# EAGLE board WB-v2.0b (EAGLE 6.1)
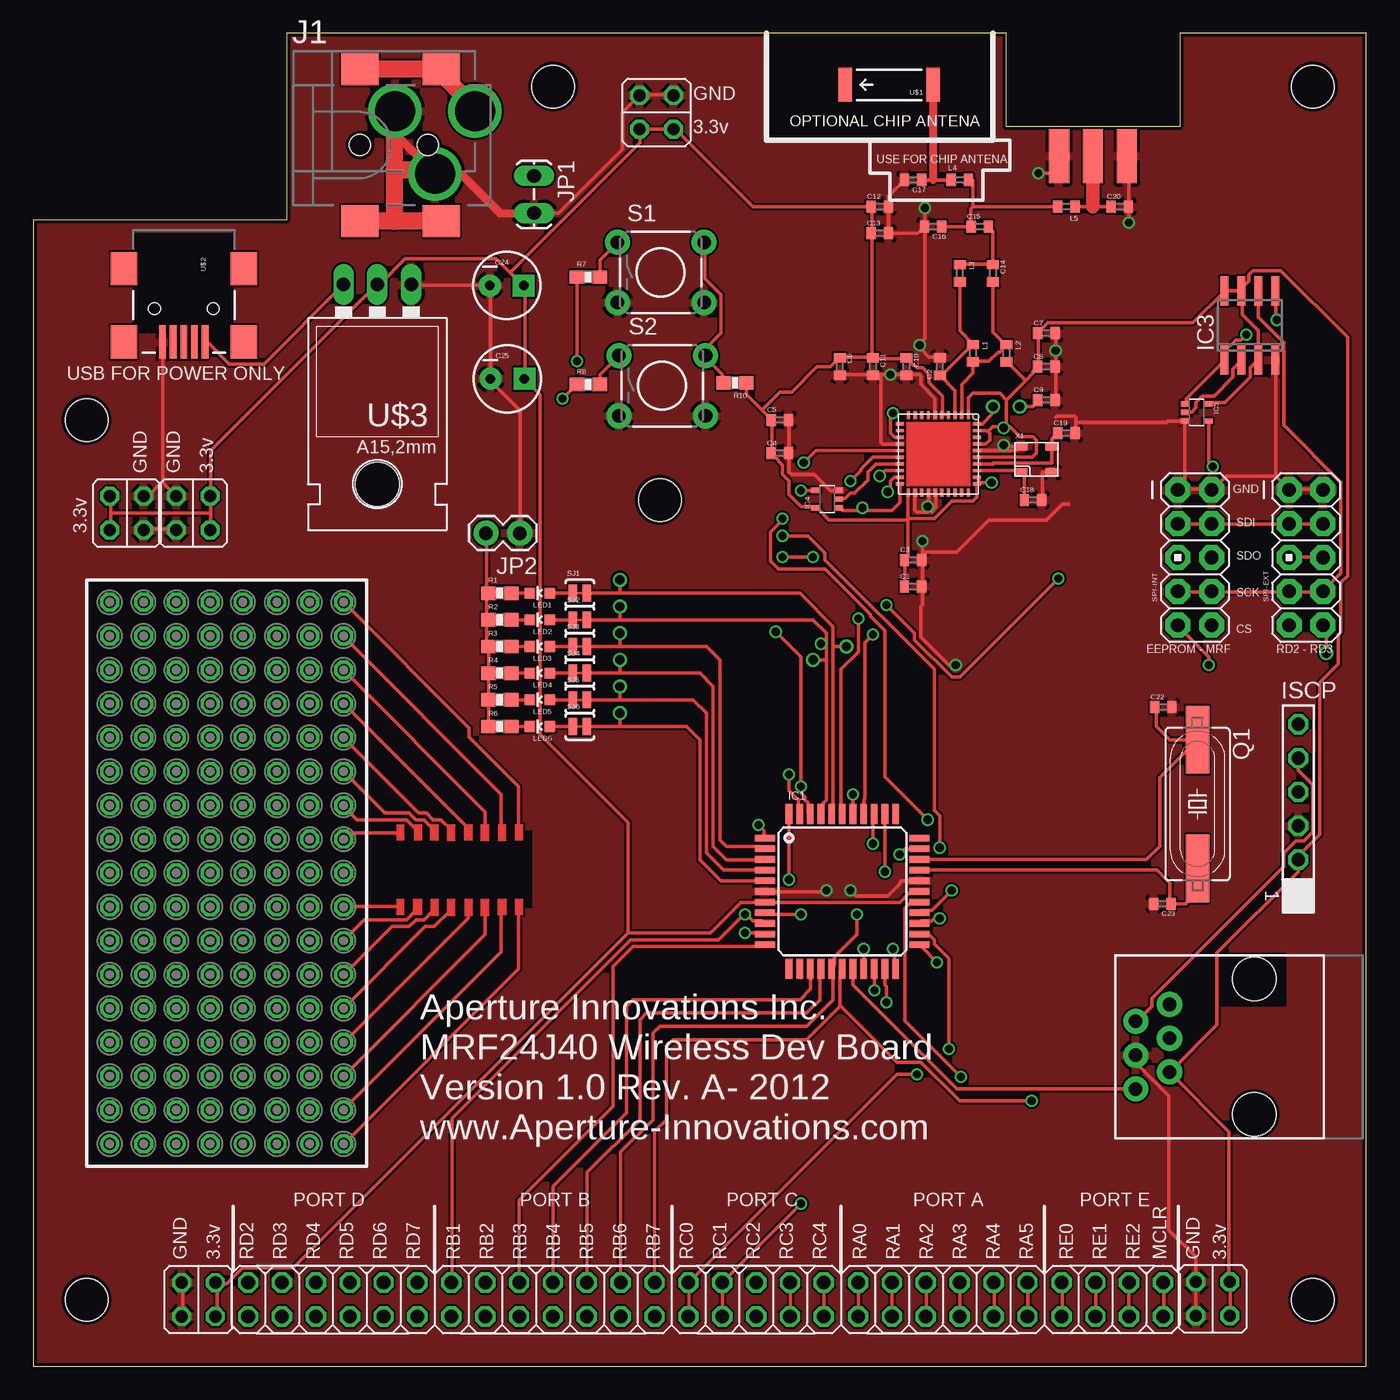
[diagram p0: board, top side]
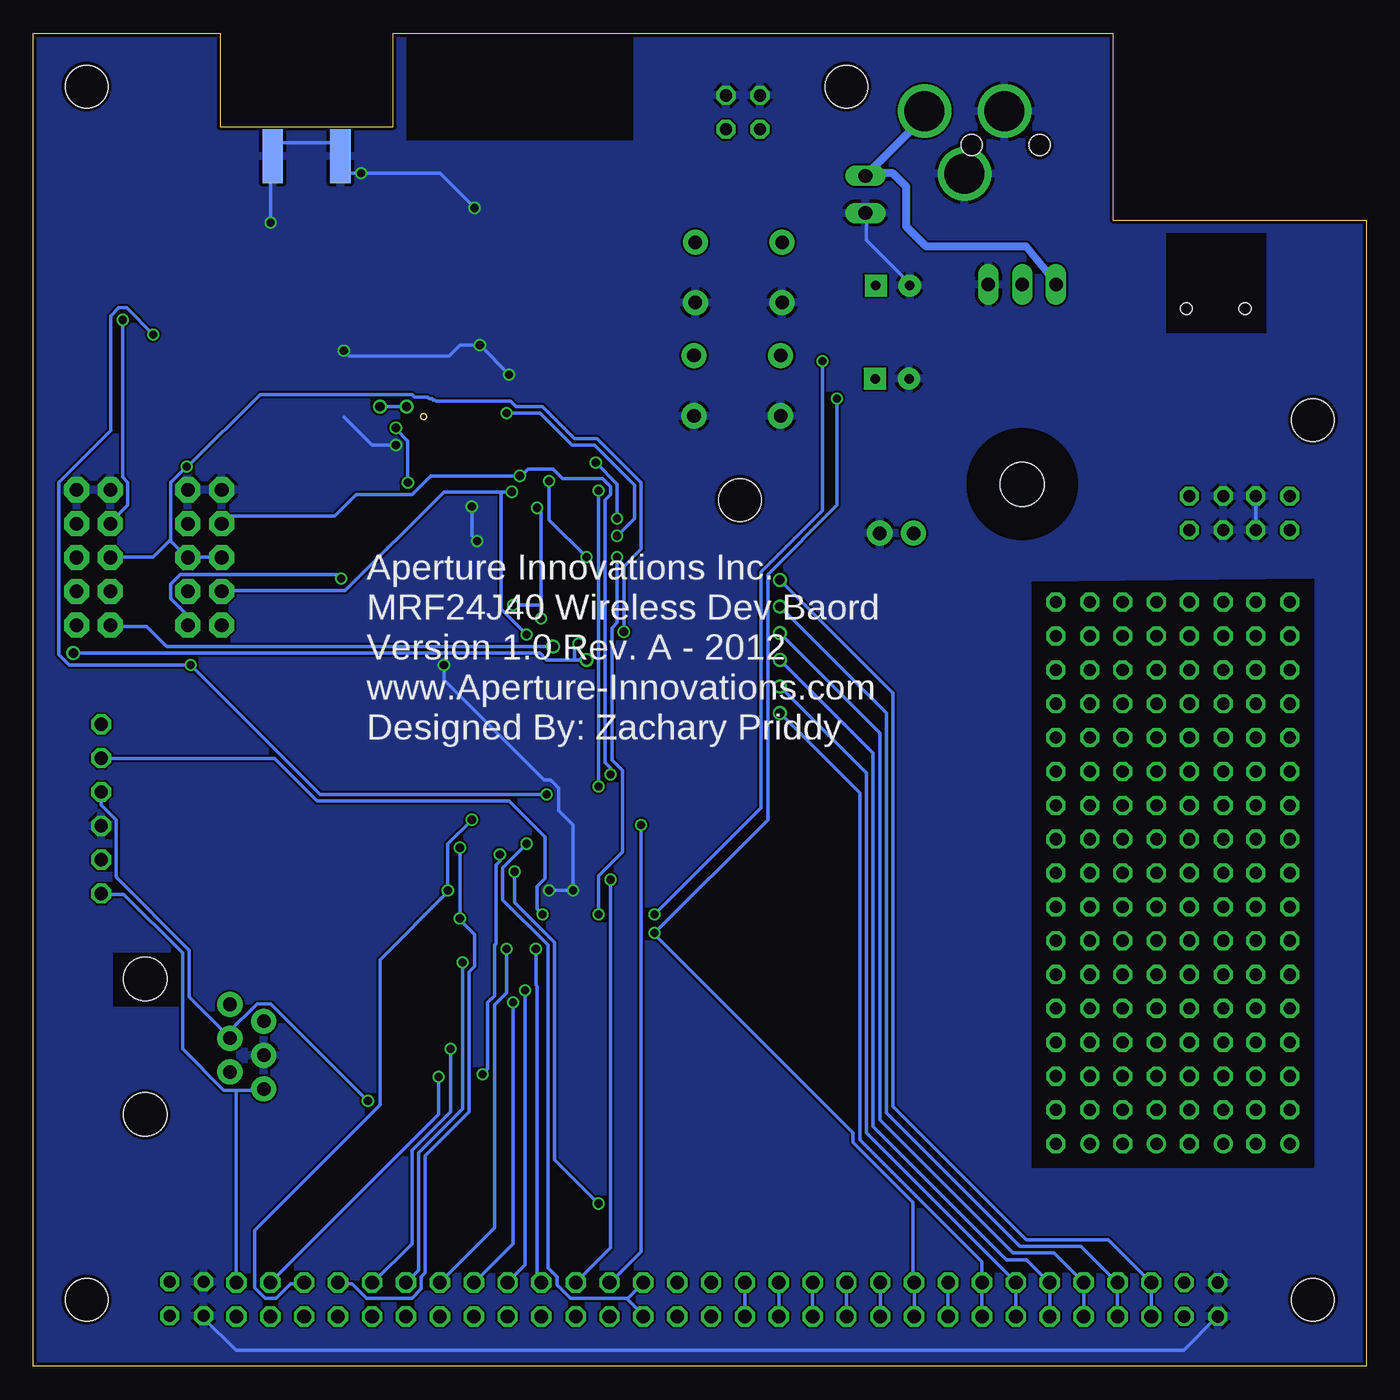
[diagram p1: board, bottom side, seen from below]

Size 100 x 100 mm. Coordinates in mm from the lower left corner, seen from the top.
Outline: 0,0 100,0 100,100 86,100 86,93 73,93 73,100 19,100 19,86 0,86 0,0
Copper layers (1*16): Top 0.035mm / dielectric 1.5mm / Bottom 0.035mm
Design rules: minimum track width 6mil, minimum drill 12mil, track to track 6mil, track to pad 6mil, pad to pad 6mil, via to via 6mil, smd to smd 0mil, copper to edge 10mil, drill to drill 10mil, minimum pad ring 10mil, minimum via ring 6mil, stop-mask expansion 2mil, vias tented up to drill 100mil, thermal gap 10mil
Holes 3.2 mm at 4,5 96,5 96,96 4,71 39,96 47,65
tRestrict: area 4,15 to 25,59; area 89,27 to 94,31; area 55,92 to 72,100; area 7.5,77.5 to 15,85; area 25.1,34.4 to 37.4,40.2
bRestrict: area 4,15 to 25,59; area 89,27 to 94,31; area 55,92 to 72,100; area 7.5,77.5 to 15,85

## Footprints (pad centres in the part's own frame; a part is rotated, then mirrored left to right if it is on the bottom)
C0402 = smd 0.7 x 0.9: 1 -0.65,0; 2 0.65,0
CPOL-RADIAL-10UF-25V = drill 0.7 pad 1.651 square: 1 1.27,0 | drill 0.7 pad 1.651: 2 -1.27,0
TQFP44 = smd 1.5 x 0.5: 1 -5.8,4; 2 -5.8,3.2; 3 -5.8,2.4; 4 -5.8,1.6; 5 -5.8,0.8; 6 -5.8,0; 7 -5.8,-0.8; 8 -5.8,-1.6; 9 -5.8,-2.4; 10 -5.8,-3.2; 11 -5.8,-4; 23 5.8,-4; 24 5.8,-3.2; 25 5.8,-2.4; 26 5.8,-1.6; 27 5.8,-0.8; 28 5.8,0; 29 5.8,0.8; 30 5.8,1.6; 31 5.8,2.4; 32 5.8,3.2; 33 5.8,4 | smd 0.5 x 1.5: 12 -4,-5.8; 13 -3.2,-5.8; 14 -2.4,-5.8; 15 -1.6,-5.8; 16 -0.8,-5.8; 17 0,-5.8; 18 0.8,-5.8; 19 1.6,-5.8; 20 2.4,-5.8; 21 3.2,-5.8; 22 4,-5.8; 34 4,5.8; 35 3.2,5.8; 36 2.4,5.8; 37 1.6,5.8; 38 0.8,5.8; 39 0,5.8; 40 -0.8,5.8; 41 -1.6,5.8; 42 -2.4,5.8; 43 -3.2,5.8; 44 -4,5.8
QFN40 = smd 0.6 x 0.25: 1 -2.9,2.25; 2 -2.9,1.75; 3 -2.9,1.25; 4 -2.9,0.75; 5 -2.9,0.25; 6 -2.9,-0.25; 7 -2.9,-0.75; 8 -2.9,-1.25; 9 -2.9,-1.75; 10 -2.9,-2.25; 21 2.9,-2.25; 22 2.9,-1.75; 23 2.9,-1.25; 24 2.9,-0.75; 25 2.9,-0.25; 26 2.9,0.25; 27 2.9,0.75; 28 2.9,1.25; 29 2.9,1.75; 30 2.9,2.25 | smd 0.25 x 0.6: 11 -2.25,-2.9; 12 -1.75,-2.9; 13 -1.25,-2.9; 14 -0.75,-2.9; 15 -0.25,-2.9; 16 0.25,-2.9; 17 0.75,-2.9; 18 1.25,-2.9; 19 1.75,-2.9; 20 2.25,-2.9; 31 2.25,2.9; 32 1.75,2.9; 33 1.25,2.9; 34 0.75,2.9; 35 0.25,2.9; 36 -0.25,2.9; 37 -0.75,2.9; 38 -1.25,2.9; 39 -1.75,2.9; 40 -2.25,2.9
SO-08 = smd 0.6 x 2.2: 1 -1.905,-2.6; 2 -0.635,-2.6; 3 0.635,-2.6; 4 1.905,-2.6; 5 1.905,2.6; 6 0.635,2.6; 7 -0.635,2.6; 8 -1.905,2.6
SC70-5 = smd 0.4 x 0.7: 1 -0.65,-0.85; 2 0,-0.85; 3 0.65,-0.85; 4 0.65,0.85; 5 -0.65,0.85
RJ11-6 = drill 1.016 pad 1.88: 1 1.905,8.89; 2 3.175,6.35; 3 4.445,8.89; 4 5.715,6.35; 5 6.985,8.89; 6 8.255,6.35 | hole 3.251: 0,0; 10.16,0
TSW-106-02-S-S = drill 1 pad 1.5 octagon: 1 6.35,0; 2 3.81,0; 3 1.27,0; 4 -1.27,0; 5 -3.81,0; 6 -6.35,0
POWER_JACK_COMBO = drill 2.997: GND 5.62,-2.16; GND@1 2.62,2.54; POWER 8.62,2.54 | smd 2.8 x 2.4: GND@3 0,-5.7; GND@4 6.1,-5.7; POWER@1 0,5.7; POWER@2 6.1,5.7 | hole 1.6: 0,0; 5.08,0
SMA-EDGE = smd 1.524 x 4.064: GND@0 0,0; GND@1 5.08,0; SIG 2.54,0 | smd 1.524 x 4.064 bottom: GND@2 0,0; GND@3 5.08,0
1X02_LOCK_LONGPADS = drill 1.016 long: 1 -0.127,0; 2 2.667,0
1X02 = drill 1.016 pad 1.88: 1 0,0; 2 2.54,0
JP2Q = drill 0.914 octagon: 1 -1.27,-1.27; 2 -1.27,1.27; 3 1.27,-1.27; 4 1.27,1.27
LED-0603 = smd 0.8 x 0.8: A 0,-0.75; C 0,0.75
FE17-2 = drill 0.914: 1 -20.32,1.27 | drill 0.914 octagon: 2 -20.32,-1.27; 3 -17.78,1.27; 4 -17.78,-1.27; 5 -15.24,1.27; 6 -15.24,-1.27; 7 -12.7,1.27; 8 -12.7,-1.27; 9 -10.16,1.27; 10 -10.16,-1.27; 11 -7.62,1.27; 12 -7.62,-1.27; 13 -5.08,1.27; 14 -5.08,-1.27; 15 -2.54,1.27; 16 -2.54,-1.27; 17 0,1.27; 18 0,-1.27; 19 2.54,1.27; 20 2.54,-1.27; 21 5.08,1.27; 22 5.08,-1.27; 23 7.62,1.27; 24 7.62,-1.27; 25 10.16,1.27; 26 10.16,-1.27; 27 12.7,1.27; 28 12.7,-1.27; 29 15.24,1.27; 30 15.24,-1.27; 31 17.78,1.27; 32 17.78,-1.27; 33 20.32,1.27; 34 20.32,-1.27
MA06-2 = drill 1.016 octagon: 1 -6.35,-1.27; 2 -6.35,1.27; 3 -3.81,-1.27; 4 -3.81,1.27; 5 -1.27,-1.27; 6 -1.27,1.27; 7 1.27,-1.27; 8 1.27,1.27; 9 3.81,-1.27; 10 3.81,1.27; 11 6.35,-1.27; 12 6.35,1.27
MA07-2 = drill 1.016 octagon: 1 -7.62,-1.27; 2 -7.62,1.27; 3 -5.08,-1.27; 4 -5.08,1.27; 5 -2.54,-1.27; 6 -2.54,1.27; 7 0,-1.27; 8 0,1.27; 9 2.54,-1.27; 10 2.54,1.27; 11 5.08,-1.27; 12 5.08,1.27; 13 7.62,-1.27; 14 7.62,1.27
MA05-2 = drill 1.016 octagon: 1 -5.08,-1.27; 2 -5.08,1.27; 3 -2.54,-1.27; 4 -2.54,1.27; 5 0,-1.27; 6 0,1.27; 7 2.54,-1.27; 8 2.54,1.27; 9 5.08,-1.27; 10 5.08,1.27
MA04-2 = drill 1.016 octagon: 1 -3.81,-1.27; 2 -3.81,1.27; 3 -1.27,-1.27; 4 -1.27,1.27; 5 1.27,-1.27; 6 1.27,1.27; 7 3.81,-1.27; 8 3.81,1.27
SM49 = smd 5.08 x 1.778: 1 -4.826,0; 2 4.826,0
0603-RES = smd 1.1 x 1: 1 -0.85,0; 2 0.85,0
TACTILE-PTH = drill 1.016 pad 1.88: 1 -3.251,2.261; 2 3.251,2.261; 3 -3.251,-2.261; 4 3.251,-2.261
SJ_2S-TRACE = smd 0.635 x 1.27: 1 -0.508,0; 2 0.508,0
AVR_ICSP = drill 1.016 pad 1.88 octagon: 1 -1.27,5.08; 2 1.27,5.08; 3 -1.27,2.54; 4 1.27,2.54; 5 -1.27,0; 6 1.27,0; 7 -1.27,-2.54; 8 1.27,-2.54; 9 -1.27,-5.08; 10 1.27,-5.08
ANTENNA-CHIP5 = smd 1.016 x 2.54: FEED -3.302,0; NC 3.302,0
USB-MINIB = smd 2.5 x 0.5: D+ 2.5,0; D- 2.5,0.8; GND 2.5,-1.6; ID 2.5,-0.8; VBUS 2.5,1.6 | smd 2.5 x 2: MTN1 -3,4.5; MTN2 2.5,4.5; MTN3 -3,-4.5; MTN4 2.5,-4.5 | hole 0.9: 0,2.2; 0,-2.2
78XXL = drill 1.016 long: GND 0,-3.81; IN -2.54,-3.81; OUT 2.54,-3.81 | hole 3.302: 0,11.176
ABM8 = smd 0.991 x 0.66: P$1 0.434,0.272; P$2 2.766,0.271; P$3 2.772,2.229; P$4 0.428,2.229

## Placement (x,y rotation side)
C1  0.01uF  [C0402]  66,58.5 0 top
C2  0.5pF  [C0402]  68,75 90 top
C3  0.01uF  [C0402]  66,60.5 0 top
C4  47pF  [C0402]  56,68.5 0 top
C5  47pF  [C0402]  56,71 0 top
C6  47pF  [C0402]  60.5,75 270 top
C7  0.01uF  [C0402]  76,77.5 0 top
C8  1uF  [C0402]  76,75 0 top
C9  100pF  [C0402]  76,72.5 0 top
C10  47pF  [C0402]  65.5,75 270 top
C11  0.1uF  [C0402]  63,75 270 top
C12  0.01uf  [C0402]  63.5,87 0 top
C13  47pf  [C0402]  63.5,85 0 top
C14  0.5pF  [C0402]  72,82 270 top
C15  0.5pF  [C0402]  71,85.5 0 top
C16  0.5pF  [C0402]  67.5,85.5 180 top
C17  0.3pF  [C0402]  66,89 180 top
C18  18pF  [C0402]  75,65 0 top
C19  18pF  [C0402]  77.5,70 0 top
C20  0.3pF  [C0402]  81.5,87 0 top
C22  18pF  [C0402]  84.77,49.45 0 top
C23  18pF  [C0402]  84.71,34.7 180 top
C24  47pf  [CPOL-RADIAL-10UF-25V]  35.52,81.08 0 top
C25  0.01uf  [CPOL-RADIAL-10UF-25V]  35.57,74.08 0 top
IC1  PIC18F4455_TQFP  [TQFP44]  60.69,35.62 0 top
IC2  MRF24J40  [QFN40]  67.91,68.44 270 top
IC3  MCHP-25LC080  [SO-08]  91.26,78.08 0 top
IC4  74AHCT1G125DCK  [SC70-5]  59.56,65.06 90 top
IC5  74AHCT1G125DCK  [SC70-5]  87.28,71.56 270 top
ICSP-RJ11  RJ11-6PTH  [RJ11-6]  91.6,18.89 90 top
ISCP  [TSW-106-02-S-S]  94.9,41.81 270 top
J1  POWER_JACKCOMBO  [POWER_JACK_COMBO]  24.51,91.62 0 top
J$1  SMA_EDGE  [SMA-EDGE]  76.96,90.79 0 top
JP1  [1X02_LOCK_LONGPADS]  37.57,89.19 270 top
JP2  [1X02]  36.5,62.5 180 top
JP3  [JP2Q]  12.39,5 90 top
JP4  [JP2Q]  88.5,5.05 90 top
JP5  [JP2Q]  7,64 270 top
JP6  [JP2Q]  12,64 90 top
JP7  [JP2Q]  46.75,94.07 0 top
L1  10nH  [C0402]  70.5,76 270 top
L2  10nH  [C0402]  73,76 270 top
L3  5.6nH  [C0402]  69.5,82 270 top
L4  4.7nH  [C0402]  69.5,89 0 top
L5  4.7nH  [C0402]  77.5,87 180 top
LED1  [LED-0603]  38,58 90 top
LED2  [LED-0603]  38,56 90 top
LED3  [LED-0603]  38,54 90 top
LED4  [LED-0603]  38,52 90 top
LED5  [LED-0603]  38,50 90 top
LED6  [LED-0603]  38,48 90 top
PB1  [FE17-2]  7,37 90 top
PB2  [FE17-2]  12,37 90 top
PB3  [FE17-2]  17,37 90 top
PB4  [FE17-2]  22,37 90 top
PORT-A  [MA06-2]  68.23,5 0 top
PORT-B  [MA07-2]  38.99,5 0 top
PORT-C  [MA05-2]  54.23,5 0 top
PORT-D  [MA06-2]  22.47,5 0 top
PORT-E  [MA04-2]  80.95,5 0 top
Q1  [SM49]  87.34,42.17 270 top
R1  470  [0603-RES]  35,58 0 top
R2  470  [0603-RES]  35,56 0 top
R3  470  [0603-RES]  35,54 0 top
R4  470  [0603-RES]  35,52 0 top
R5  470  [0603-RES]  35,50 0 top
R6  470  [0603-RES]  35,48 0 top
R7  1k  [0603-RES]  41.64,81.71 0 top
R8  1k  [0603-RES]  41.64,73.65 0 top
R10  10k  [0603-RES]  52.64,73.78 180 top
S1  [TACTILE-PTH]  47.07,82.06 0 top
S2  [TACTILE-PTH]  47.18,73.56 0 top
SJ1  [SJ_2S-TRACE]  41,58 0 top
SJ2  [SJ_2S-TRACE]  41,56 0 top
SJ3  [SJ_2S-TRACE]  41,54 0 top
SJ4  [SJ_2S-TRACE]  41,52 0 top
SJ5  [SJ_2S-TRACE]  41,50 0 top
SJ6  [SJ_2S-TRACE]  41,48 0 top
SPI-EXT  M05X2PTH  [AVR_ICSP]  95.49,60.67 0 top
SPI-INT  M05X2PTH  [AVR_ICSP]  87.14,60.67 0 top
U$1  ANTENNA2SMD5  [ANTENNA-CHIP5]  64.22,96.14 180 top
U$2  USB-MINIB-5PIN  [USB-MINIB]  11.29,79.35 270 top
U$3  3.3V  [78XXL]  25.81,77.35 180 top
X1  ABM8  [ABM8]  73.66,66.79 0 top

## Library data of the parts
C1-C20 C22 C23 IC4 IC5 JP3-JP7 X1 = ZPRIDDY
C24 C25 ICSP-RJ11 J1 J$1 JP1 JP2 L1-L5 LED1-LED6 R1-R8 R10 S1 S2 SJ1-SJ6 SPI-EXT SPI-INT U$1-U$3 = SparkFun
IC1 = ZPRIDDY; MF: MICROCHIP; MPN: PIC18F4455-I/PT; OC_FARNELL: 9321322; OC_NEWARK: 08J9628
IC2 = mrf24j40
IC3 = microchip; MF: MICROCHIP; MPN: 25AA080/SN; OC_FARNELL: 1816072; OC_NEWARK: 92C7351
ISCP = con-samtec; OC_FARNELL: unknown; OC_NEWARK: unknown
PB1-PB4 PORT-A PORT-B PORT-C PORT-D PORT-E = ZPRIDDY; OC_FARNELL: unknown; OC_NEWARK: unknown
Q1 = crystal; OC_FARNELL: unknown; OC_NEWARK: unknown

## Nets
EEPROM-CS: IC1.38 IC3.1 IC5.1 SPI-INT.9
GND: C1.2 C2.2 C3.2 C4.2 C5.2 C6.2 C7.2 C8.2 C9.2 C10.2 C11.2 C12.2 C13.2 C16.2 C17.2 C18.2 C19.2 C20.2 C22.2 C23.2 C24.2 C25.2 IC1.6 IC1.29 IC2.6 IC2.14 IC2.22 IC2.24 IC2.25 IC2.36 IC3.4 IC4.3 IC5.3 ICSP-RJ11.3 ISCP.3 J1.GND J1.GND@1 J$1.GND@0 J$1.GND@1 J$1.GND@2 J$1.GND@3 JP1.2 JP2.1 JP3.2 JP3.4 JP4.2 JP4.4 JP5.2 JP5.4 JP6.2 JP6.4 JP7.2 JP7.4 S1.3 S1.4 S2.3 S2.4 SPI-EXT.1 SPI-EXT.2 SPI-INT.1 SPI-INT.2 U$2.GND U$3.IN X1.P$2 X1.P$4
MCLR: IC1.18 ICSP-RJ11.1 ISCP.1 PORT-E.7 PORT-E.8
MRF-CS: IC1.39 IC2.20 IC4.1 SPI-INT.10
MRF-INT: IC1.8 IC2.16
N$1: C14.1 C15.2 L3.1
N$2: C2.1 IC2.3 L1.1 L3.2
N$3: C14.2 IC2.2 L1.2 L2.1
N$4: C15.1 C16.1 L4.2 L5.2
N$5: C17.1 L4.1 U$1.FEED
N$6: C9.1 IC2.40
N$7: C18.1 IC2.33 X1.P$1
N$8: C19.1 IC2.34 X1.P$3
N$9: C20.1 J$1.SIG L5.1
N$10: IC2.17 IC4.2
N$11: IC3.2 IC5.2
N$12: C23.1 IC1.30 Q1.2
N$13: C22.1 IC1.31 Q1.1
N$14: LED1.C R1.2
N$15: LED2.C R2.2
N$16: LED3.C R3.2
N$17: LED4.C R4.2
N$18: LED5.C R5.2
N$19: LED6.C R6.2
N$20: R7.2 S1.1
N$21: R10.2 S1.2 S2.2
N$22: LED1.A SJ1.1
N$23: LED3.A SJ3.1
N$24: LED4.A SJ4.1
N$25: LED5.A SJ5.1
N$26: LED6.A SJ6.1
N$27: R8.2 S2.1
N$29: LED2.A SJ2.1
N$30: JP2.2 R1.1 R2.1 R3.1 R4.1 R5.1 R6.1
N$31: PB4.34
N$32: PB4.32
N$33: PB4.30
N$34: PB4.28
N$35: PB4.26
N$36: PB4.24
N$37: PB4.22
N$38: PB4.20
N$39: PB4.2
N$40: PB4.4
N$41: PB4.6
N$42: PB4.8
N$43: PB4.10
N$44: PB4.12
N$45: PB4.14
N$46: PB4.16
RA0: IC1.19 PORT-A.1 PORT-A.2
RA1: IC1.20 PORT-A.3 PORT-A.4
RA2: IC1.21 PORT-A.5 PORT-A.6
RA3: IC1.22 PORT-A.7 PORT-A.8
RA4: IC1.23 PORT-A.9 PORT-A.10
RA5: IC1.24 PORT-A.11 PORT-A.12
RB1: IC1.9 PORT-B.1 PORT-B.2 R7.1
RB2: IC1.10 PORT-B.3 PORT-B.4 R8.1
RB3: IC1.11 PORT-B.5 PORT-B.6
RB4: IC1.14 PORT-B.7 PORT-B.8
RB5: IC1.15 PORT-B.9 PORT-B.10
RB6: IC1.16 ICSP-RJ11.5 ISCP.5 PORT-B.11 PORT-B.12
RB7: IC1.17 ICSP-RJ11.4 ISCP.4 PORT-B.13 PORT-B.14
RC0: IC1.32 PORT-C.1 PORT-C.2
RC1: IC1.35 PORT-C.3 PORT-C.4
RC2: IC1.36 PORT-C.5 PORT-C.6
RD2: IC1.40 PORT-D.1 PORT-D.2 SJ1.2 SPI-EXT.9
RD3: IC1.41 PORT-D.3 PORT-D.4 SJ2.2 SPI-EXT.10
RD4: IC1.2 PORT-D.5 PORT-D.6 SJ3.2
RD5: IC1.3 PORT-D.7 PORT-D.8 SJ4.2
RD6: IC1.4 PORT-D.9 PORT-D.10 SJ5.2
RD7: IC1.5 PORT-D.11 PORT-D.12 SJ6.2
RE0: IC1.25 IC2.13 PORT-E.1 PORT-E.2
RE1: IC1.26 IC2.15 PORT-E.3 PORT-E.4
RE2: IC1.27 PORT-E.5 PORT-E.6
RX: IC1.1 PORT-C.7 PORT-C.8
SCK: IC1.37 IC2.19 IC3.6 SPI-EXT.7 SPI-EXT.8 SPI-INT.7 SPI-INT.8
SDI: IC1.43 IC2.18 IC3.5 SPI-EXT.3 SPI-EXT.4 SPI-INT.3 SPI-INT.4
SDO: IC1.42 IC4.4 IC5.4 SPI-EXT.5 SPI-EXT.6 SPI-INT.5 SPI-INT.6
TX: IC1.44 PORT-C.9 PORT-C.10
VCC: C1.1 C3.1 C4.1 C5.1 C6.1 C7.1 C8.1 C10.1 C11.1 C12.1 C13.1 C24.1 C25.1 IC1.7 IC1.28 IC2.1 IC2.4 IC2.5 IC2.21 IC2.31 IC2.32 IC2.35 IC2.37 IC2.39 IC3.3 IC3.7 IC3.8 IC4.5 IC5.5 ICSP-RJ11.2 ISCP.2 JP3.1 JP3.3 JP4.1 JP4.3 JP5.1 JP5.3 JP6.1 JP6.3 JP7.1 JP7.3 L2.2 R10.1 U$3.GND
VIN: J1.POWER JP1.1 U$2.VBUS U$3.OUT

## Tracks (layer width: path | path; a pad name or v marks a point on that pad's centre or on a via)
EEPROM-CS  (via drill 0.61)
  Top 0.254: IC5.1 86.5,72.3 86.5,72.6 89.3,75.4 IC3.1 89.4,75.6 89.4,76.2 90.2,77 90.6,77 v91,77.4 | v61.5,42.9 61.5,41.5 IC1.38 | v88.2,52.6 88.2,53.2 85.9,55.5 SPI-INT.9
  Bottom 0.254: v61.5,42.9 78.5,42.9 v88.2,52.6 97.3,52.6 98.1,53.4 98.1,66.3 94.2,70.2 94.2,78.8 93.6,79.4 93,79.4 v91,77.4
GND  (via drill 0.61)
  Top 0.254: C17.2 64.15,87.8 C12.2 C13.2 66.35,85 C16.2 | IC2.36 73.76,68.69 X1.P$4 73.8,68.9 73.7,69 72.9,69 v72.8,69.1 | J$1.GND@1 82,90.7 82,89.4 82.2,89.2 82.2,87 C20.2 82.2,86.9 v82.2,85.8 | v75.4,89.5 76.9,89.5 77,89.6 77,90.7 J$1.GND@2 | IC4.3 59.8,65.7 58.6,66.9 56.9,66.9 56.7,67.1 56.7,68.5 C4.2 56.7,68.6 56.7,71 C5.2 | IC2.6 67.65,71.4 67.65,72.6 66.6,73.7 66.6,74.3 66.5,74.4 65.5,74.4 C10.2 65.4,74.4 v64.3,74.4 63.6,74.4 | 63.6,74.4 63.6,69.3 63.7,69.2 IC2.14 | 63.6,74.4 63,74.4 C11.2 62.9,74.4 60.5,74.4 C6.2 | C2.2 68,75.7 67.2,75.7 66.5,76.4 v66.5,76.6 66.5,76.7 66.9,77.1 66.9,85.2 66.8,85.3 C16.2 | v66.9,86.9 66.9,85.6 C16.2 | JP5.4 8.3,62.8 10.7,62.8 JP6.2 | 9.7,66.3 9.7,76.8 | JP6.4 9.7,66.3 | JP5.2 8.3,65.3 8.6,65.3 9.6,66.3 9.7,66.3 | JP7.4 48,95.4 45.5,95.4 JP7.2 45.4,95.3 44.2,94.1 44.2,91.3 39.4,86.5 37.6,86.5 JP1.2 | U$3.IN 28.4,81.1 34.2,81.1 C24.2 34.3,81 C25.2 34.3,73.9 36.5,71.7 JP2.1 | 43.9,71.7 S2.3 | JP3.2 11.2,3.8 11.2,6.2 JP3.4 | JP4.2 JP4.4 87.2,8.2 85.2,10.2 85.2,20.3 82.8,22.7 82.8,23.3 ICSP-RJ11.3 | v59.5,35.7 59.4,35.6 54.9,35.6 IC1.6 | v61.3,35.7 61.7,35.3 64.1,35.3 65,36.2 65,36.3 65.1,36.4 66.4,36.4 IC1.29 | 67.2,64.2 67.1,64.1 66.3,64.1 66.15,64.2 66.15,65.5 IC2.22 | 67.2,64.5 67.2,65.5 IC2.24 | 67.2,64.5 67.2,64.2 | IC2.25 67.7,65.5 67.7,64.4 67.4,64.1 67.3,64.2 67.2,64.2 | 66.7,61.1 66.7,60.6 C3.2 66.7,60.5 66.7,58.5 C1.2 66.7,58.4 66.7,57.1 66.6,57 66.6,54.7 68.7,52.6 v69.2,52.6 | 66.7,61.1 v66.7,61.9 | v67.1,64.5 67.2,64.5 | C18.2 75.7,65.5 75.7,67.1 76.4,67.1 X1.P$2 | C7.2 76.7,77.5 v76.7,76.2 76.7,75.1 C8.2 76.7,75 76.7,72.5 C9.2 76.7,72.4
  Top 0.254: 78.2,70.8 78.2,71.2 78.1,71.3 76.8,71.3 76.7,71.2 | 78.2,70.8 78.2,70.1 C19.2 | 66.7,61.1 69.3,61.1 71.7,63.5 76,63.5 77.2,64.7 77.7,64.7 | 93.2,66.8 93.2,75.4 IC3.4 | 93.2,66.8 94.2,65.8 SPI-EXT.1 94.3,65.8 96.7,65.8 SPI-EXT.2 | 93.2,66.8 89.5,66.8 88.5,65.8 SPI-INT.2 88.4,65.8 85.9,65.8 SPI-INT.1 86.4,65.9 86.4,70.9 IC5.3 86.3,70.9 85.1,70.9 85,70.8 78.2,70.8
  Top 0.61: J1.GND@1 27.13,92.46 J1.GND 32.04,89.46 35,86.5 37.55,86.5 JP1.2
  Bottom 0.254: v82.2,85.8 82.2,89.2 82,89.4 82,90.7 J$1.GND@1 82,90.8 82,91.8 77,91.8 77,90.9 J$1.GND@2 77,90.7 77,89.6 76.9,89.5 v75.4,89.5 69.5,89.5 v66.9,86.9 | v64.3,74.4 v66.5,76.6 68,76.6 68.8,75.8 76.3,75.8 v76.7,76.2 | JP5.4 8.3,62.8 8.3,65.2 JP5.2 | JP1.2 37.5,86.5 37.5,84.5 34.3,81.3 34.3,81.1 C24.2 | JP4.2 87.2,3.6 84.8,1.2 13.7,1.2 11.2,3.7 JP3.2 | v61.3,35.7 v59.5,35.7 59.5,40.6 60.6,41.7 60.6,43.4 61.2,44 61.7,44 69.2,51.5 v69.2,52.6 | v67.1,64.5 67.1,62.3 v66.7,61.9 | v72.8,69.1 74.6,69.1 76.7,71.2
  pour Bottom: -8.5,106 112,106 112,-10.5 -7.5,-10.5 -7.5,104
  pour Top: -19.5,111 117,111 117,-13.5 -19.5,-13.5 -19.5,109
MCLR
  Top 0.254: PORT-E.7 84.8,3.8 84.8,6.2 PORT-E.8 | IC1.18 61.5,29.8 61.5,28.6 69.3,20.8 ICSP-RJ11.1
  Bottom 0.254: 84.8,20.7 82.8,20.7 ICSP-RJ11.1 | 84.8,20.7 85.7,20.7 88.8,23.8 88.8,31 93.2,35.4 94.9,35.4 ISCP.1 | 84.8,20.7 84.8,6.3 PORT-E.8
MRF-CS  (via drill 0.61)
  Top 0.254: 62.2,64.2 60.7,64.2 60.5,64.4 IC4.1 | 62.2,64.2 64.4,64.2 65,64.8 65,66.1 IC2.20 | v61.9,56.1 61.9,53.6 60.6,52.3 60.6,41.5 IC1.39 | v62.2,64.4 62.2,64.2 | v76.9,59.1 69.5,51.7 68.9,51.7 66.1,54.5 66.1,55 v64,57.1
  Bottom 0.254: 61.9,57.1 61.9,64.1 v62.2,64.4 | 61.9,57.1 v61.9,56.1 | v76.9,59.1 77.2,59.4 89,59.4 89.7,58.7 89.7,57.6 88.5,56.4 88.5,55.6 SPI-INT.10 | 61.9,57.1 v64,57.1
MRF-INT  (via drill 0.61)
  Top 0.254: v61.3,66.4 62.1,67.2 62.1,67.3 63,68.2 IC2.16 | v56.2,60.7 v58.5,60.7 | v57.6,33.9 55,33.9 54.9,34 IC1.8
  Bottom 0.254: v61.3,66.4 61.3,63.5 v58.5,60.7 | v56.2,60.7 56.2,55.8 56.6,55.4 56.6,45.5 55.8,44.7 55.8,38.6 57.6,36.8 v57.6,33.9
N$1
  Top 0.254: C14.1 72,83 | C14.1 72,85.15 C15.2 | L3.1 69.5,82.7 71.9,82.7 C14.1
N$2
  Top 0.254: IC2.3 69.16,73.19 C2.1 68.2,74.3 68.2,74.4 70.4,76.6 L1.1 70.5,76.7 69.5,77.7 L3.2
N$3
  Top 0.254: C14.2 72,77.6 72.9,76.7 L2.1 73,76.6 72.5,76.1 72.4,76.1 71.7,75.4 70.5,75.4 L1.2 70.5,74.5 69.66,73.66 IC2.2
N$4
  Top 0.254: 70.35,89 L4.2 70.5,89 70.5,87 | 70.5,87 L5.2 | C16.1 C15.1 70.35,86.85 70.5,87
N$5
  Top 0.254: L4.1 67.5,89 C17.1 | U$1.FEED 67.5,96.14
  Top 0.61: 67.5,96.14 67.5,89
N$6  (via drill 0.7 pad 0.61)
  Top 0.254: IC2.40 71.19,70.69 72,71.5 v72,72 | v74,72 75,72 75.45,72.45 | 75.45,72.45 75.5,72.5 | C9.1 75.4,72.5 75.45,72.45
  Bottom 0.254: v72,72 v74,72
N$7
  Top 0.254: IC2.33 74,67.19 74,67 74.09,67 X1.P$1 74.35,66.81 C18.1
N$8
  Top 0.254: IC2.34 72,67.69 72,67.75 76.4,67.75 76.43,67.79 X1.P$3 76.43,69.58 C19.1
N$9
  Top 0.254: 79.5,87 L5.1 C20.1
  Top 1.016: J$1.SIG 79.5,87
N$10
  Top 0.254: IC2.17 63.2,67.7 62.6,67.1 62.6,66.5 61.6,65.5 61.3,65.5 60.9,65.1 60.5,65.1 IC4.2
N$11
  Top 0.254: IC5.2 86.5,71.6 86.9,71.6 87.2,71.9 87.2,72.3 87.7,72.8 88.6,72.8 90,74.2 90,74.8 90.6,75.4 IC3.2
N$12
  Top 0.254: IC1.30 84.28,37.22 85.25,36.25 85.25,34.7 | 85.25,34.7 85.25,34.5 | Q1.2 87.25,37.25 87.25,35.5 86.45,34.7 C23.1 85.25,34.7
N$13
  Top 0.254: IC1.31 83.52,38.02 84.5,39 84.5,44.16 Q1.1 85.25,47 84.25,48 84.25,49.32 C22.1
N$14
  Top 0.254: R1.2 LED1.C
N$15
  Top 0.254: R2.2 LED2.C
N$16
  Top 0.254: R3.2 LED3.C
N$17
  Top 0.254: R4.2 LED4.C
N$18
  Top 0.254: R5.2 LED5.C
N$19
  Top 0.254: R6.2 LED6.C
N$20
  Top 0.254: R7.2 42.5,81.8 42.5,83 43.8,84.3 S1.1
N$21
  Top 0.254: S1.2 50.4,84.3 50.4,81.6 51.6,80.4 51.6,77.5 50.5,76.4 S2.2 50.4,75.7 51.7,74.4 51.7,73.8 R10.2
N$22
  Top 0.254: LED1.A SJ1.1
N$23
  Top 0.254: LED3.A SJ3.1
N$24
  Top 0.254: LED4.A SJ4.1
N$25
  Top 0.254: LED5.A SJ5.1
N$26
  Top 0.254: LED6.A SJ6.1
N$27
  Top 0.254: R8.2 42.5,73.7 42.5,74.4 43.9,75.8 S2.1
N$28  (via drill 0.7 pad 0.61)
  other vias: 58.5,53
N$29
  Top 0.254: LED2.A SJ2.1
N$30
  Top 0.254: 34,56 34,58 R1.1 34,58.1 34,62.5 JP2.2 | R2.1 34,56 | 34,56 34,54.1 | 34,54.1 34,54 | 34,48 R6.1 R5.1 R4.1 R3.1 34.1,54.1 34,54.1
N$31
  Top 0.254: 36.45,40.05 36.4,40.1 36.4,43.5 32.7,47.2 32.7,47.9 23.3,57.3 PB4.34
N$32
  Top 0.254: 35.17,40.05 35.1,40.1 35.1,42.9 23.3,54.7 PB4.32
N$33
  Top 0.254: 33.91,40.05 33.9,40.1 33.9,41.6 23.3,52.2 PB4.30
N$34
  Top 0.254: 32.63,40.05 32.6,40.1 32.6,40.4 23.3,49.7 PB4.28
N$35
  Top 0.254: 31.36,40.05 31.3,40.1 31.3,40.3 30.6,41 30,41 29.5,41.5 28.9,41.5 23.3,47.1 PB4.26
N$36
  Top 0.254: 30.09,40.05 30,40.1 30,40.3 29.3,41 28.7,41 28.2,41.5 26.4,41.5 23.3,44.6 PB4.24
N$37
  Top 0.254: 28.82,40.05 28.8,40.1 28.8,40.2 28,41 24.3,41 23.3,42 PB4.22
N$38
  Top 0.254: 27.55,40.05 27.5,40 23.7,40 23.3,39.6 PB4.20
N$39
  Top 0.254: 36.45,34.45 36.4,34.4 36.4,29.8 23.3,16.7 PB4.2
N$40
  Top 0.254: 35.17,34.45 35.1,34.4 35.1,31.1 23.3,19.3 PB4.4
N$41
  Top 0.254: 33.91,34.45 33.9,34.4 33.9,32.4 23.3,21.8 PB4.6
N$42
  Top 0.254: 32.63,34.45 32.6,34.4 32.6,33.6 23.3,24.3 PB4.8
N$43
  Top 0.254: 31.36,34.45 31.3,34.4 31.3,34.2 30.05,33 29.45,33 29.4,33 23.3,26.9 PB4.10
N$44
  Top 0.254: 30.09,34.45 30,34.4 30,34.2 29.3,33.5 28.7,33.5 28.2,33 26.9,33 23.3,29.4 PB4.12
N$45
  Top 0.254: 28.82,34.45 28.8,34.4 28.8,34.3 28,33.5 24.8,33.5 23.3,32 PB4.14
N$46
  Top 0.254: 27.55,34.45 27.5,34.5 23.3,34.5 PB4.16
RA0  (via drill 0.61)
  Top 0.254: v62.3,31.3 62.3,29.9 IC1.19 | PORT-A.1 61.9,3.8 61.9,6.2 PORT-A.2
  Bottom 0.254: v62.3,31.3 62.3,28.6 62.2,28.5 62.2,6.6 61.9,6.3 PORT-A.2
RA1  (via drill 0.61)
  Top 0.254: v63.1,28.2 63.1,29.8 IC1.20 | PORT-A.3 64.4,3.8 64.4,6.2 PORT-A.4
  Bottom 0.254: v63.1,28.2 63.1,7.6 64.4,6.3 PORT-A.4
RA2  (via drill 0.61)
  Top 0.254: v64,27.3 64,28.5 63.9,28.6 63.9,29.8 IC1.21 | PORT-A.5 67,3.8 67,6.2 PORT-A.6
  Bottom 0.254: v64,27.3 64,9.2 66.9,6.3 PORT-A.6
RA3  (via drill 0.61)
  Top 0.254: v64.5,31.3 64.6,31.2 64.6,29.9 IC1.22 | PORT-A.8 PORT-A.7
  Bottom 0.254: v64.5,31.3 64.5,28 65.4,27.1 65.4,10.4 69.5,6.3 PORT-A.8
RA4  (via drill 0.61)
  Top 0.254: v67.8,30.3 66.5,31.6 IC1.23 | PORT-A.9 72.1,3.8 72.1,6.2 PORT-A.10
  Bottom 0.254: v67.8,30.3 67.8,19.3 71.1,16 71.1,7.2 72,6.3 PORT-A.10
RA5  (via drill 0.61)
  Top 0.254: v68.7,23.8 68.7,30.6 67.6,31.7 67.6,32 67.2,32.4 66.5,32.4 IC1.24 | PORT-A.11 74.6,3.8 74.6,6.2 PORT-A.12
  Bottom 0.254: v68.7,23.8 68.7,19.1 71.6,16.2 71.6,9.2 74.5,6.3 PORT-A.12
RB1  (via drill 0.61)
  Top 0.254: v40.8,75.4 R7.1 | IC1.9 54.8,33.3 54.7,33.4 54,33.4 53.5,33.9 v53.4,33.9 53.3,33.9 51.4,32 44.8,32 31.4,18.6 31.4,6.3 PORT-B.2
  Bottom 0.254: PORT-B.2 31.37,3.8 | 31.37,3.8 PORT-B.1 | PORT-B.1 31.37,3.63 31.5,3.5 | PORT-B.1 31.4,3.8 31.37,3.8 | v40.8,75.4 40.8,64.2 45.4,59.6 45.4,41.9 v53.4,33.9
RB2  (via drill 0.61)
  Top 0.254: v39.7,72.6 40.7,73.6 R8.1 | v53.4,32.5 54.8,32.5 IC1.10
  Bottom 0.254: PORT-B.3 PORT-B.4 34,6.3 34,12.3 38.5,16.8 38.5,17.5 53.4,32.4 v53.4,32.5 44.9,41 44.9,59.4 39.7,64.6 v39.7,72.6
RB3
  Top 0.254: PORT-B.6 36.45,12.45 43.5,19.5 43.5,30 45,31.5 54.9,31.5 | 54.9,31.5 55,31.5 | IC1.11 54.9,31.6 54.9,31.5
  Bottom 0.254: PORT-B.5 PORT-B.6
RB4
  Top 0.254: IC1.14 58.29,28.29 57.5,27.5 45,27.5 44.5,27 44.5,19 39,13.5 PORT-B.8
  Bottom 0.254: PORT-B.7 PORT-B.8
RB5
  Top 0.254: PORT-B.10 41.53,14.53 45.5,18.5 45.5,26 46,26.5 58,26.5 59,27.5 59,29.73 IC1.15
  Bottom 0.254: PORT-B.9 PORT-B.10
RB6  (via drill 0.61)
  Top 0.254: PORT-B.12 44.07,16.07 46.5,18.5 46.5,25 47,25.5 58,25.5 60,27.5 60,29.71 IC1.16 59.9,29.9 60.1,30.1 60.1,30.7 61.8,32.4 v61.8,33.9 | ISCP.5 94.9,44.7 96,43.6 96,40.1 95.3,39.4 94.7,39.4 93.8,38.5 93.8,37.5 83.9,27.6 83.9,27 82.8,25.9 ICSP-RJ11.5
  Bottom 0.254: PORT-B.11 PORT-B.12 | v61.8,33.9 62.2,34.3 62.2,36 61.6,36.6 61.6,39.7 64.3,42.4 78.7,42.4 81.9,45.6 94.9,45.6 ISCP.5
RB7  (via drill 0.61)
  Top 0.254: PORT-B.14 46.61,17.61 47.5,18.5 47.5,24 48,24.5 58,24.5 60.5,27 | 60.5,27 60.5,29.63 IC1.17 | v74.9,19.9 69.5,19.9 66.6,22.8 64.8,22.8 60.6,27 60.5,27
  Bottom 0.254: PORT-B.13 PORT-B.14 | ISCP.4 94.9,42.1 93.8,41 93.8,36.7 88.3,31.2 88.3,27.7 85.3,24.7 ICSP-RJ11.4 85.5,25 85.4,25 83.2,27.2 82.2,27.2 v74.9,19.9
RC0  (via drill 0.61)
  Top 0.254: v65,38.4 65.4,38.8 66.4,38.8 IC1.32 | v66.3,21.9 64.8,21.9 49.2,6.3 PORT-C.2 49.2,6.2 49.2,3.8 PORT-C.1
  Bottom 0.254: v65,38.4 65,37.9 65.3,37.6 65.3,31.7 65.4,31.6 65.4,27.8 65.9,27.3 65.9,22.3 v66.3,21.9
RC1  (via drill 0.61)
  Top 0.254: v63.9,37.1 63.9,41.4 IC1.35 | v57.6,12.2 51.7,6.3 PORT-C.4 51.7,6.2 51.7,3.8 PORT-C.3
  Bottom 0.254: v63.9,37.1 63.9,34.8 60.9,31.8 60.9,15.5 v57.6,12.2
RC2  (via drill 0.61)
  Top 0.254: v63,39.2 63,41.4 IC1.36
  Bottom 0.254: v63,39.2 64.8,37.4 64.8,35 61.4,31.6 61.4,7.4 60.7,6.7 60.7,6.1 59.7,5.1 55.4,5.1 | PORT-C.6 55.4,5.1 | PORT-C.5 54.3,3.8 54.3,3.9 55.4,5 55.4,5.1
RD2  (via drill 0.7 pad 0.61)
  Top 0.254: 60,54 60,41.5 IC1.40 | 60,54 60,55.5 57.5,58 44,58 | SJ1.2 44,58 | 60,54 v61,54 | v44,59 44,58
  Bottom 0.254: PORT-D.1 PORT-D.2 19.35,9.5 25.5,9.5 35.5,19.5 35.5,50.5 v44,59 | SPI-EXT.9 94,55.5 91.5,55.5 90,54 v61,54
RD3  (via drill 0.61, 0.7, 0.7 pad 0.61)
  Top 0.254: 59.5,53 59.5,42.5 59,42 59,41.5 IC1.41 | 44,56 58.5,56 59.5,55 59.5,54.2 | 44,56 SJ2.2 | 59.5,54.2 59.5,53 | SPI-EXT.10 97,55.5 v97,53.5 | v44,57 44,56 | 59.5,53 58.5,53 | 59.5,54.2 v59.1,54.2
  Bottom 0.254: PORT-D.3 PORT-D.4 21.39,9 26,9 36,19 36,49 v44,57 | v97,53.5 62,53.5 61.5,53 59.4,53 | 59.4,53 58.5,53 | 59.4,53 59.4,53.9 v59.1,54.2
RD4  (via drill 0.7 pad 0.61)
  Top 0.254: IC1.2 54.5,39 52,39 51.5,39.5 51.5,53 50.5,54 44,54 | 44,54 SJ3.2 | v44,55 44,54
  Bottom 0.254: PORT-D.5 PORT-D.6 23.43,8.5 26.5,8.5 36.5,18.5 36.5,47.5 v44,55
RD5  (via drill 0.7 pad 0.61)
  Top 0.254: IC1.3 54.5,38 52,38 51,39 51,51 50,52 44,52 | 44,52 SJ4.2 | v44,53 44,52
  Bottom 0.254: PORT-D.7 PORT-D.8 23.77,6.27 25.5,8 27,8 37,18 37,46 v44,53
RD6  (via drill 0.7 pad 0.61)
  Top 0.254: IC1.4 51.78,37.22 50.5,38.5 50.5,49 49.5,50 44,50 | 44,50 SJ5.2 | v44,51 44,50
  Bottom 0.254: PORT-D.9 PORT-D.10 37.5,17.5 37.5,44.5 v44,51
RD7  (via drill 0.7 pad 0.61)
  Top 0.254: IC1.5 51.58,36.42 50,38 50,47 49,48 44,48 | 44,48 SJ6.2 | v44,49 44,48
  Bottom 0.254: PORT-D.11 PORT-D.12 28.82,7.82 38,17 38,43 v44,49
RE0  (via drill 0.61)
  Top 0.254: PORT-E.1 77.2,3.8 77.2,6.2 PORT-E.2 | v64.5,71.5 64.3,71.3 64.3,70 64.6,69.7 IC2.13 | v56.2,62.3 58.1,62.3 59.4,61 59.4,60.5 67.6,52.3 67.6,41.7 68,41.3 v68,38.9 | v68,33.6 67.6,33.6 67.4,33.4 66.6,33.4 66.5,33.3 IC1.25
  Bottom 0.254: v64.5,71.5 62,71.5 59.6,69.1 57.9,69.1 54.9,66.1 54.9,63.6 v56.2,62.3 | v68,38.9 v68,33.6 68,33.5 66.9,32.4 66.9,30 67.3,29.6 67.3,19.1 70.6,15.8 70.6,7 70.9,6.7 70.9,5.8 71.6,5.1 75,5.1 76.1,6.2 77.1,6.2 PORT-E.2
RE1  (via drill 0.61)
  Top 0.254: PORT-E.3 79.7,3.8 79.7,6.2 PORT-E.4 | v57.8,67.8 58.7,68.7 IC2.15 | v56.2,63.6 56.2,63.5 55.3,62.6 55.3,60.4 55.9,59.8 59.4,59.8 62.8,56.4 62.8,56.3 63.9,55.2 63.9,44.2 v67.1,41 | v68.9,35.7 67.4,34.2 66.6,34.2 66.5,34.1 IC1.26
  Bottom 0.254: v57.8,67.8 56.2,66.2 v56.2,63.6 | v67.1,41 68.9,39.2 v68.9,35.7 68.9,35.6 74,30.5 74,19.6 83.4,10.2 83.4,5.9 82.6,5.1 81.8,5.1 80.7,6.2 79.7,6.2 PORT-E.4
RE2  (via drill 0.61)
  Top 0.254: v69.6,21.7 65.4,25.9 65.4,34.4 65.8,34.8 66.4,34.8 IC1.27 | PORT-E.5 82.2,3.8 82.2,6.2 PORT-E.6
  Bottom 0.254: v69.6,21.7 69.6,18.9 82.2,6.3 PORT-E.6
RX  (via drill 0.61)
  Top 0.254: v54.4,40.6 54.8,40.2 54.8,39.7 IC1.1 | PORT-C.7 56.8,3.8 56.8,6.2 PORT-C.8
  Bottom 0.254: v54.4,40.6 54.4,8.6 56.7,6.3 PORT-C.8
SCK  (via drill 0.61)
  Top 0.254: IC3.6 91.9,80.6 91.9,78.7 93.8,76.8 93.8,70.6 98.1,66.3 98.1,59.5 96.8,58.2 SPI-EXT.8 96.7,58.1 94.3,58.1 SPI-EXT.7 94.1,58.1 88.5,58.1 SPI-INT.8 88.4,58.1 85.9,58.1 SPI-INT.7 | v64.1,65.6 64.3,65.8 64.3,66.4 64.6,66.7 IC2.19 | v63,54.9 62.4,54.3 62.4,42.6 62.3,42.5 62.3,41.5 IC1.37
  Bottom 0.254: 64.9,65.6 69.2,65.6 76.6,58.2 85.8,58.2 SPI-INT.7 | 64.9,65.6 v64.1,65.6 | v63,54.9 64.9,56.8 64.9,65.6
SDI  (via drill 0.61)
  Top 0.254: v93.3,78.5 93.2,78.6 93.2,80.6 IC3.5 | SPI-EXT.4 96.7,63.2 94.3,63.2 SPI-EXT.3 94.1,63.2 88.5,63.2 SPI-INT.4 85.9,63.2 SPI-INT.3 | v63.5,66.8 63.9,67.2 IC2.18 | v56.7,44.4 56.7,43.2 57.4,42.5 57.4,41.5 IC1.43
  Bottom 0.254: v93.3,78.5 93.3,66.7 92.9,66.3 92.9,64.6 94.2,63.3 SPI-EXT.3 | SPI-INT.3 85.8,63.3 85.3,63.8 77.4,63.8 75.8,65.4 71.6,65.4 70.2,66.8 v63.5,66.8 63.4,66.8 62.9,67.3 61,67.3 60.3,66.6 57.3,66.6 56.7,66 56.7,65.4 57.1,65 57.1,45.3 56.7,44.9 v56.7,44.4
SDO  (via drill 0.61)
  Top 0.254: v57.6,65.7 IC4.4 | IC1.42 58.2,41.5 58.1,41.6 58.1,42.3 57.9,42.5 57.9,42.7 57.6,43 v57.6,43.5 57.6,53.2 v55.7,55.1 | SPI-EXT.5 94.3,60.7 96.7,60.7 SPI-EXT.6 | v88.5,67.5 88.2,67.8 88.2,70.9 IC5.4
  Bottom 0.254: v57.6,43.5 v57.6,65.7 | 89.7,61.9 89.7,66.3 v88.5,67.5 88.4,67.5 83,72.9 71.6,72.9 71.4,72.7 70.4,72.7 70.3,72.6 70.1,72.6 70,72.5 69.9,72.5 69.8,72.4 64.2,72.4 63.8,72 61.8,72 59.4,69.6 57.7,69.6 54.4,66.3 54.4,61.3 55.7,60 v55.7,55.1 | 89.7,61.9 88.5,60.7 SPI-INT.6 88.3,60.7 85.9,60.7 SPI-INT.5 | SPI-EXT.5 94.2,60.7 91,60.7 89.8,61.9 89.7,61.9
TX  (via drill 0.61)
  Top 0.254: v56.7,36.5 56.7,41.4 IC1.44 | PORT-C.9 59.3,3.8 59.3,6.2 PORT-C.10
  Bottom 0.254: v56.7,36.5 56.7,8.9 59.3,6.3 PORT-C.10
VCC  (via drill 0.61)
  Top 0.254: IC2.35 74.94,68.19 75.25,68.5 75.25,69.5 75,69.75 74,69.75 73.25,70.5 73,70.5 | IC2.37 71.44,69.19 71.75,69.5 71.75,70 71.62,70.12 | 71.62,70.12 71.45,70.2 IC2.39 | 73,70.5 72.8,70.5 | 72.8,70.5 72,70.5 71.62,70.12 | IC2.1 70.16,72.66 70.5,73 72.5,73 73,72.5 | 73,72.5 73,70.5 | 73,72.5 74.45,73.95 | 74.45,73.95 75,74.5 75,74.65 C8.1 75.4,75.1 75.4,77.5 C7.1 75.4,77.6 76.1,78.3 87,78.3 89.3,80.6 IC3.8 89.4,80.7 90.6,80.7 IC3.7 | JP3.1 13.8,3.8 13.8,6.2 JP3.3 13.9,6.2 14.5,6.2 15.7,7.4 19.5,7.4 44.6,32.5 | IC1.28 66.4,35.6 66.3,35.5 65.7,35.5 65,34.8 54.9,34.8 IC1.7 54.8,34.8 53.1,34.8 50.8,32.5 44.6,32.5 | 5.8,64 5.8,65.2 JP5.1 | 5.8,64 5.8,62.8 JP5.3 | 13.3,64 13.3,65.2 JP6.3 13.3,65.3 13.3,68.7 25.7,81.1 U$3.GND 25.9,81.2 26,81.2 27.9,83.1 34.7,83.1 35.75,82.05 | 13.3,64 13.3,62.8 JP6.1 | 13.3,64 5.8,64 | 35.75,82.05 36.7,81.1 C24.1 36.9,81 36.9,74.1 C25.1 36.9,74 38,72.9 38,47.4 44.6,40.8 44.6,32.5 | 35.75,82.05 45.5,91.8 45.5,92.7 JP7.1 JP7.3 48.1,92.8 48.15,92.85 | JP4.1 89.8,3.8 89.8,6.3 JP4.3 89.7,6.4 89.7,17.6 85.3,22 ICSP-RJ11.2 85.3,22.1 88.8,25.6 88.8,31 94.9,37.1 ISCP.2 94.9,38.3 96.5,39.9 96.5,51.3 97.9,52.7 97.9,54.9 98.1,55.1 98.1,58.8 98.6,59.3 98.6,77.2 93.6,82.2 91.5,82.2 91.2,81.9 91.2,81.4 90.6,80.8 IC3.7 | 74.45,73.95 73.1,75.3 73,75.3 L2.2 | IC5.5 88.2,72.3 89.4,72.3 91.3,74.2 91.3,74.9 91.8,75.4 IC3.3 91.9,75.6 91.9,77.7 90.7,78.9 90.7,80.6 IC3.7 | IC2.4 68.6,71.4 68.2,71.4 IC2.5 68.2,71.5 68.2,72.8 67.2,73.8 67.2,74.4 66.7,74.9 66.3,74.9 66.1,75.1 66,75.1 65.5,75.6 C10.1 65.4,75.6 63.1,75.6 C11.1 | C11.1 63,75.7 60.5,75.7 C6.1 60.4,75.6 59.8,75 58.8,75 56.9,73.1 56,73.1 54.65,71.75
  Top 0.254: C11.1 62.9,75.8 62.9,84.9 C13.1 62.9,85 62.9,87 C12.1 54,87 48.15,92.85 | IC2.31 70.9,66.2 70.9,66.6 IC2.32 | 65.6,63.5 65.6,60.7 65.4,60.5 C3.1 65.4,60.4 65.4,58.5 C1.1 | 65.6,63.5 65.6,63.6 | 65.6,63.6 65.6,65.5 IC2.21 | 65.6,63.6 67.6,63.6 68.9,64.9 70.5,64.9 70.8,65.2 70.8,66.1 IC2.31 | 65.6,63.5 59.7,63.5 58.8,64.4 IC4.5 58.7,64.5 57.6,64.5 56.7,65.4 56.7,66.4 56.2,66.9 56.2,67.6 55.9,67.9 55.9,68 55.4,68.5 C4.1 55.4,68.6 55.4,71 C5.1 55.3,71.1 54.65,71.75 | v71.9,66.3 71,66.3 IC2.31 | v72.8,70.4 72.8,70.5 | 48.15,92.85 48,93 | 54.65,71.75 53.5,72.9 53.5,73.7 R10.1
  Bottom 0.254: v72.8,70.4 72.8,70.3 71.9,69.4 v71.9,66.3
VIN
  Top 0.254: U$2.VBUS 12.9,76.8 13.1,76.8 14.7,75.2 17.3,75.2 23.2,81.1 U$3.OUT
  Bottom 0.254: 37.5,89.4 JP1.1 37.6,89.3 37.4,89.1 | 33.2,94.1 J1.POWER
  Bottom 0.61: U$3.OUT 23.16,81.16 25.5,84 33,84 34.5,85.5 34.5,88.5 35.5,89.5 37,89.5 37.4,89.1 37.5,89 | J1.POWER 33.13,93.76 JP1.1
(copper drawn outside any net)
  shapes: Top area x16

## Text on the board
tNames: GND | OPTIONAL CHIP ANTENA | 3.3v | USE FOR CHIP ANTENA | USB FOR POWER ONLY | GND | GND | 3.3v | GND | SDI | 3.3v | SDO | SCK | CS | EEPROM - MRF | RD2 - RD3 | Aperture Innovations Inc. | MRF24J40 Wireless Dev Board | Version 1.0 Rev. A | - 2012 | www.Aperture-Innovations.com | PORT D | PORT B | PORT C | PORT A | PORT E | GND | 3.3v | RD2 | RD3 | RD4 | RD5 | RD6 | RD7 | RB1 | RB2 | RB3 | RB4 | RB5 | RB6 | RB7 | RC0 | RC1 | RC2 | RC3 | RC4 | RA0 | RA1 | RA2 | RA3 | RA4 | RA5 | RE0 | RE1 | RE2 | MCLR | GND | 3.3v
bNames: Aperture Innovations Inc. | MRF24J40 Wireless Dev Baord | Version 1.0 Rev. A - 2012 | www.Aperture-Innovations.com | Designed By: Zachary Priddy